# Altium PCB 导电压片.PcbDoc
Units mm, origin at the board's own origin, x right, y up, seen from the top; angles counter-clockwise.
Board outline 166.25 x 80.78 mm, 2 copper layers (Top Layer, Bottom Layer); 3 components, 19 nets, 93 pads, 24 vias.
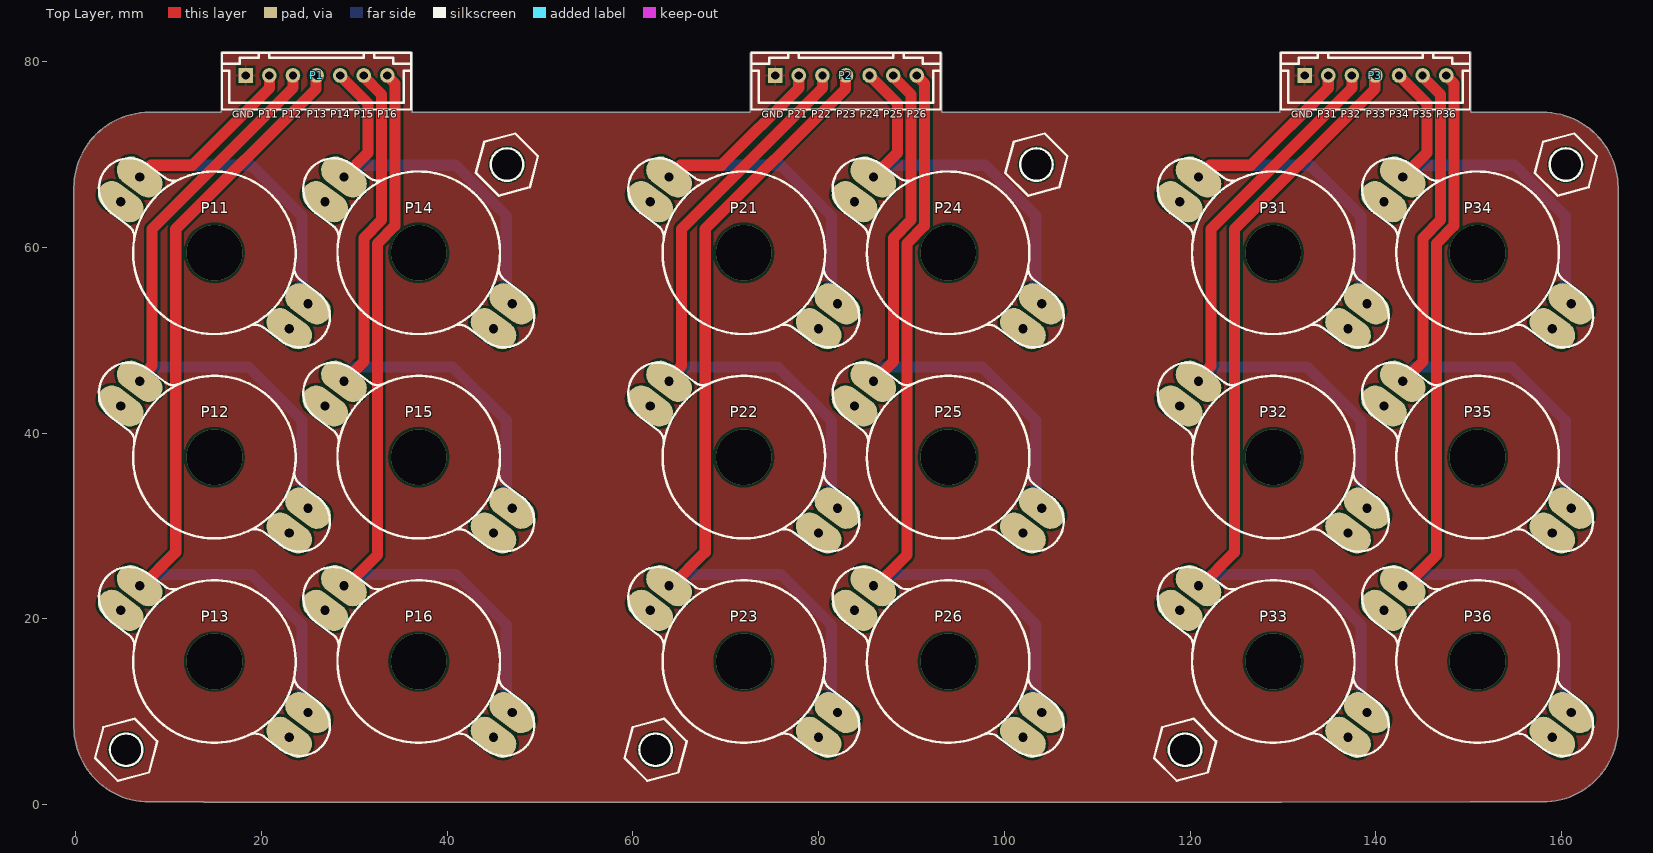
[diagram p0: Top Layer view]
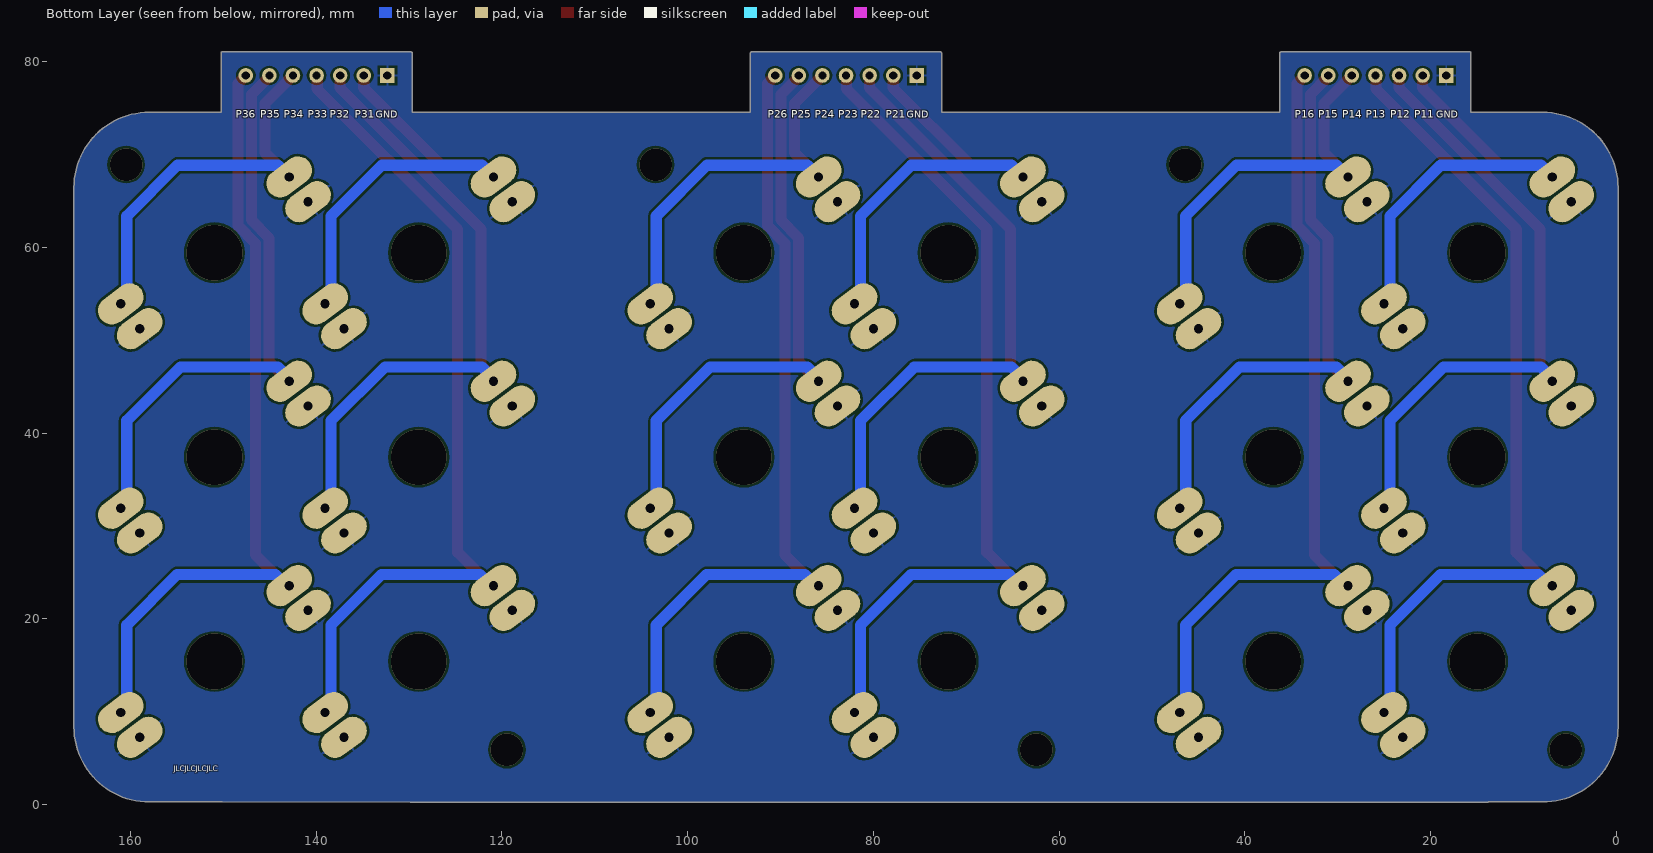
[diagram p1: Bottom Layer view, seen from below]

## Layer stack, top to bottom
Top Solder: solder mask 0.0102, Solder Resist, Dk 3.5
Top Layer: signal copper 0.0356
Dielectric 1: dielectric 0.32, FR-4, Dk 4.8
Bottom Layer: signal copper 0.0356
Bottom Solder: solder mask 0.0102, Solder Resist, Dk 3.5

## Board outline
157.955,74.534 150.241,74.534 150.241,80.909 ccw(c150.113,80.909) 150.113,81.037 129.795,81.037 ccw(c129.795,80.909) 129.668,80.909 129.668,74.558 93.24,74.558 93.24,80.909 ccw(c93.112,80.909) 93.112,81.037 72.794,81.037 ccw(c72.794,80.909) 72.667,80.909 72.667,74.558 36.241,74.558 36.241,80.909 ccw(c36.113,80.909) 36.113,81.037 15.795,81.037 ccw(c15.795,80.909) 15.668,80.909 15.668,74.549 8.001,74.558 ccw(c8.001,74.43) 7.927,74.534 ccw(c7.955,66.407) -0.173,66.407 -0.173,8.407 ccw(c7.955,8.407) 7.955,0.279 13.793,0.279 ccw(c13.867,0.383) 13.867,0.256 50.546,0.256 ccw(c50.546,0.383) 50.547,0.256 68.604,0.256 105.283,0.256 ccw(c105.283,0.383) 105.284,0.256 129.794,0.256 ccw(c129.794,0.383) 129.853,0.27 150.114,0.28 ccw(c150.114,0.407) 150.125,0.28 ccw(c150.14,0.407) 150.14,0.279 157.955,0.279 ccw(c157.955,8.407) 166.082,8.407 166.082,66.407 ccw(c157.955,66.407)

## Design rules (kind name [scope] priority, off if disabled: settings)
Clearance [All] p1: gap=0.254 ignorepadtopadclearanceinfootprint=FALSE except(0: Arc-Hole Track-Hole SMDPad-Hole THPad-Hole Via-Hole Fill-Hole Poly-Hole Region-Hole Text-Hole)
PolygonConnect [All] p1: connectstyle=Relief reliefconductorwidth=0.254 reliefentries=4 polygonreliefangle="90 Angle" airgapwidth=0.254
RoutingVias [All] p1: holewidth=0.711 width=1.27 viastyle="Through Hole" minholewidth=0.711 minwidth=1.27 maxholewidth=0.711 maxwidth=1.27
SolderMaskExpansion [All] p1: expansion=0.102
Width [All] p1: maxlimit=3 minlimit=0.254 preferedwidth=0.254 minimp=50.000000 maximp=50.000000 favimp=50.000000
30 further rules are at their usual default settings.

## Components (designator, comment, footprint, x,y, rotation, side; value= is the part's Value field where it differs from the comment)
P1 "Header-1X7P-2.54" HDR-7X1/2.54 25.954,78.496 r0 top locked
P2 "Header-1X7P-2.54" HDR-7X1/2.54 82.953,78.496 r0 top locked
P3 "Header-1X7P-2.54" HDR-7X1/2.54 139.954,78.496 r0 top locked

## Footprints (in the part's own frame and the unit in brackets; to place one, negate y for a bottom-side part, rotate by r counter-clockwise, add the part's x,y. Pads: shape width x height; smd on the part's side, far side on the other; paste and mask are expansions set on the pad)
HDR-7X1/2.54 [mil]
  rect 62x62 hole 35: 1(-300,0)
  round 62 hole 35: 2(-200,0) 3(-100,0) 4(0,0) 5(100,0) 6(200,0) 7(300,0)
  silkscreen extent -400,-145 400,95

## Free pads (board coordinates)
  oval 3x5.4 hole 1 rot 53: 2(4.873,20.907) 2(4.873,42.907) 2(4.873,64.907) 2(25.036,9.906) 2(25.036,31.906) 2(25.036,53.906) 2(26.873,20.907) 2(26.873,42.907) 2(26.873,64.907) 2(47.036,9.906) 2(47.036,31.906) 2(47.036,53.906) 2(61.873,20.907) 2(61.873,42.907) 2(61.873,64.907) 2(82.036,9.906) 2(82.036,31.906) 2(82.036,53.906) 2(83.873,20.907) 2(83.873,42.907) 2(83.873,64.907) 2(104.036,9.906) 2(104.036,31.906) 2(104.036,53.906) 2(118.873,20.907) 2(118.873,42.907) 2(118.873,64.907) 2(139.036,9.906) 2(139.036,31.906) 2(139.036,53.906) 2(140.873,20.907) 2(140.873,42.907) 2(140.873,64.907) 2(161.036,9.906) 2(161.036,31.906) 2(161.036,53.906) 3(6.905,23.574) 3(6.905,45.574) 3(6.905,67.574) 3(23.004,7.239) 3(23.004,29.239) 3(23.004,51.239) 3(28.905,23.574) 3(28.905,45.574) 3(28.905,67.574) 3(45.004,7.239) 3(45.004,29.239) 3(45.004,51.239) 3(63.905,23.574) 3(63.905,45.574) 3(63.905,67.574) 3(80.004,7.239) 3(80.004,29.239) 3(80.004,51.239) 3(85.905,23.574) 3(85.905,45.574) 3(85.905,67.574) 3(102.004,7.239) 3(102.004,29.239) 3(102.004,51.239) 3(120.905,23.574) 3(120.905,45.574) 3(120.905,67.574) 3(137.004,7.239) 3(137.004,29.239) 3(137.004,51.239) 3(142.905,23.574) 3(142.905,45.574) 3(142.905,67.574) 3(159.004,7.239) 3(159.004,29.239) 3(159.004,51.239)

## Via types
v1: diameter 6, hole 6, Top Layer to Bottom Layer, 18 vias
v2: diameter 3.5, hole 3.5, Top Layer to Bottom Layer, 6 vias

## Nets (pads, with @x,y where several pads share a name; then routed paths per layer and width w, separated by ;. In a path a pad name is that pad's centre, name@x,y a point inside that pad or via, vN(x,y) a via of type N, cw(c..) or ccw(c..) an arc to the next point about the centre after c; other vN are vias at no path point)
GND: P1.1 P2.1 P3.1 pad.2@4.873,20.907 pad.2@4.873,42.907 pad.2@4.873,64.907 pad.2@26.873,20.907 pad.2@26.873,42.907 pad.2@26.873,64.907 pad.2@61.873,20.907 pad.2@61.873,42.907 pad.2@61.873,64.907 pad.2@83.873,20.907 pad.2@83.873,42.907 pad.2@83.873,64.907 pad.2@118.873,20.907 pad.2@118.873,42.907 pad.2@118.873,64.907 pad.2@140.873,20.907 pad.2@140.873,42.907 pad.2@140.873,64.907 pad.3@23.004,7.239 pad.3@23.004,29.239 pad.3@23.004,51.239 pad.3@45.004,7.239 pad.3@45.004,29.239 pad.3@45.004,51.239 pad.3@80.004,7.239 pad.3@80.004,29.239 pad.3@80.004,51.239 pad.3@102.004,7.239 pad.3@102.004,29.239 pad.3@102.004,51.239 pad.3@137.004,7.239 pad.3@137.004,29.239 pad.3@137.004,51.239 pad.3@159.004,7.239 pad.3@159.004,29.239 pad.3@159.004,51.239
P11: P1.2 pad.2@25.036,53.906 pad.3@6.905,67.574 | length 49.5
  Top Layer w1.2: pad.3@6.778,67.447 6.778,67.484 8.128,68.834 12.573,68.834 20.874,77.135 P1.2
  Bottom Layer w1.2: pad.3@6.905,67.574 6.905,67.611 8.128,68.834 18.923,68.834 24.384,63.373 24.384,54.558 pad.2@25.036,53.906
P12: P1.3 pad.2@25.036,31.906 pad.3@6.905,45.574 | length 70.5
  Top Layer w1.2: pad.3@6.362,45.863 6.874,45.863 8.255,47.244 8.255,61.976 23.414,77.135 P1.3
  Bottom Layer w1.2: pad.3@6.905,45.537 6.905,45.574 6.905,45.894 8.128,47.117 18.603,47.117 24.384,41.336 24.384,32.521 pad.2@25.036,31.869
P13: P1.4 pad.2@25.036,9.906 pad.3@6.905,23.574 | length 92.9
  Top Layer w1.2: pad.3@7.074,23.447 10.795,27.169 10.795,61.976 25.883,77.064 25.883,78.425 P1.4
  Bottom Layer w1.2: pad.3@6.905,23.537 6.905,23.574 7.191,23.574 8.382,24.765 18.955,24.765 24.384,19.336 24.384,10.521 pad.2@25.036,9.869
P14: P1.5 pad.2@47.036,53.906 pad.3@28.905,67.574 | length 43.5
  Top Layer w1.2: P1.5 31.509,75.482 31.509,70.178 28.905,67.574 pad.3@28.778,67.447
  Bottom Layer w1.2: pad.3@28.905,67.574 28.905,67.611 30.128,68.834 40.923,68.834 46.384,63.373 46.384,54.558 pad.2@47.036,53.906
P15: P1.6 pad.2@47.036,31.906 pad.3@28.905,45.574 | length 66.1
  Top Layer w1.2: pad.3@28.778,45.447 28.905,45.574 31.058,47.727 31.058,61.017 32.963,62.922 32.963,76.466 31.034,78.395 P1.6
  Bottom Layer w1.2: pad.3@28.905,45.537 28.905,45.574 28.905,45.894 30.128,47.117 40.603,47.117 46.384,41.336 46.384,32.521 pad.2@47.036,31.869
P16: P1.7 pad.2@47.036,9.906 pad.3@28.905,23.574 | length 87.9
  Top Layer w1.2: pad.3@28.778,23.447 29.074,23.447 32.512,26.886 32.512,60.414 34.417,62.319 34.417,77.607 P1.7@33.528,78.496
  Bottom Layer w1.2: pad.3@28.905,23.537 28.905,23.574 29.191,23.574 30.382,24.765 40.955,24.765 46.384,19.336 46.384,10.521 pad.2@47.036,9.869
P21: P2.2 pad.2@82.036,53.906 pad.3@63.905,67.574 | length 49.5
  Top Layer w1.2: pad.3@63.778,67.447 63.778,67.484 65.128,68.834 69.573,68.834 77.874,77.135 P2.2
  Bottom Layer w1.2: pad.3@63.905,67.574 63.905,67.611 65.128,68.834 75.923,68.834 81.384,63.373 81.384,54.558 pad.2@82.036,53.906
P22: P2.3 pad.2@82.036,31.906 pad.3@63.905,45.574 | length 70.5
  Top Layer w1.2: pad.3@63.362,45.863 63.874,45.863 65.255,47.244 65.255,61.976 80.414,77.135 P2.3
  Bottom Layer w1.2: pad.3@63.905,45.537 63.905,45.574 63.905,45.894 65.128,47.117 75.603,47.117 81.384,41.336 81.384,32.521 pad.2@82.036,31.869
P23: P2.4 pad.2@82.036,9.906 pad.3@63.905,23.574 | length 92.9
  Top Layer w1.2: pad.3@64.074,23.447 67.795,27.169 67.795,61.976 82.883,77.064 82.883,78.425 P2.4
  Bottom Layer w1.2: pad.3@63.905,23.537 63.905,23.574 64.191,23.574 65.382,24.765 75.955,24.765 81.384,19.336 81.384,10.521 pad.2@82.036,9.869
P24: P2.5 pad.2@104.036,53.906 pad.3@85.905,67.574 | length 43.5
  Top Layer w1.2: P2.5 88.509,75.482 88.509,70.178 pad.3@85.778,67.447
  Bottom Layer w1.2: pad.3@85.905,67.574 85.905,67.611 87.128,68.834 97.923,68.834 103.384,63.373 103.384,54.558 pad.2@104.036,53.906
P25: P2.6 pad.2@104.036,31.906 pad.3@85.905,45.574 | length 66.1
  Top Layer w1.2: pad.3@85.778,45.447 88.058,47.727 88.058,61.017 89.963,62.922 89.963,76.466 88.034,78.395 P2.6
  Bottom Layer w1.2: pad.3@85.905,45.537 85.905,45.574 85.905,45.894 87.128,47.117 97.603,47.117 103.384,41.336 103.384,32.521 pad.2@104.036,31.869
P26: P2.7 pad.2@104.036,9.906 pad.3@85.905,23.574 | length 87.9
  Top Layer w1.2: pad.3@85.778,23.447 86.074,23.447 89.512,26.886 89.512,60.414 91.417,62.319 91.417,77.607 P2.7@90.528,78.496
  Bottom Layer w1.2: pad.3@85.905,23.537 85.905,23.574 86.191,23.574 87.382,24.765 97.955,24.765 103.384,19.336 103.384,10.521 pad.2@104.036,9.869
P31: P3.2 pad.2@139.036,53.906 pad.3@120.905,67.574 | length 49.5
  Top Layer w1.2: pad.3@120.778,67.447 120.778,67.484 122.128,68.834 126.573,68.834 134.874,77.135 P3.2
  Bottom Layer w1.2: pad.3@120.905,67.574 120.905,67.611 122.128,68.834 132.923,68.834 138.384,63.373 138.384,54.558 pad.2@139.036,53.906
P32: P3.3 pad.2@139.036,31.906 pad.3@120.905,45.574 | length 70.5
  Top Layer w1.2: pad.3@120.362,45.863 120.874,45.863 122.255,47.244 122.255,61.976 137.414,77.135 P3.3
  Bottom Layer w1.2: pad.3@120.905,45.537 120.905,45.574 120.905,45.894 122.128,47.117 132.603,47.117 138.384,41.336 138.384,32.521 pad.2@139.036,31.869
P33: P3.4 pad.2@139.036,9.906 pad.3@120.905,23.574 | length 92.9
  Top Layer w1.2: pad.3@121.074,23.447 124.795,27.169 124.795,61.976 139.883,77.064 139.883,78.425 P3.4
  Bottom Layer w1.2: pad.3@120.905,23.537 120.905,23.574 121.191,23.574 122.382,24.765 132.955,24.765 138.384,19.336 138.384,10.521 pad.2@139.036,9.869
P34: P3.5 pad.2@161.036,53.906 pad.3@142.905,67.574 | length 43.5
  Top Layer w1.2: P3.5 145.509,75.482 145.509,70.178 pad.3@142.778,67.447
  Bottom Layer w1.2: pad.3@142.905,67.574 142.905,67.611 144.128,68.834 154.923,68.834 160.384,63.373 160.384,54.558 pad.2@161.036,53.906
P35: P3.6 pad.2@161.036,31.906 pad.3@142.905,45.574 | length 66.1
  Top Layer w1.2: pad.3@142.778,45.447 145.058,47.727 145.058,61.017 146.963,62.922 146.963,76.466 145.034,78.395 P3.6
  Bottom Layer w1.2: pad.3@142.905,45.537 142.905,45.574 142.905,45.894 144.128,47.117 154.603,47.117 160.384,41.336 160.384,32.521 pad.2@161.036,31.869
P36: P3.7 pad.2@161.036,9.906 pad.3@142.905,23.574 | length 87.9
  Top Layer w1.2: pad.3@142.778,23.447 143.074,23.447 146.512,26.886 146.512,60.414 148.417,62.319 148.417,77.607 P3.7@147.528,78.496
  Bottom Layer w1.2: pad.3@142.905,23.537 142.905,23.574 143.191,23.574 144.382,24.765 154.955,24.765 160.384,19.336 160.384,10.521 pad.2@161.036,9.869
copper on no net:
  other v1: 14.955,15.407 36.955,15.407 71.955,15.407 93.955,15.407 128.955,15.407 150.955,15.407 14.955,37.407 36.955,37.407 71.955,37.407 93.955,37.407 128.955,37.407 150.955,37.407 14.955,59.407 36.955,59.407 71.955,59.407 93.955,59.407 128.955,59.407 150.955,59.407
  other v2: 5.455,5.907 62.455,5.907 119.455,5.907 46.455,68.907 103.455,68.907 160.455,68.907

## Polygon pours and split planes (outlines as drawn)
GND on Bottom Layer "Top Layer-No Net1" (solid, pour order 2): 157.955,74.534 150.241,74.534 150.241,80.909 ccw(c150.113,80.909) 150.113,81.037 129.795,81.037 ccw(c129.795,80.909) 129.668,80.909 129.668,74.558 93.24,74.558 93.24,80.909 ccw(c93.112,80.909) 93.112,81.037 72.794,81.037 ccw(c72.794,80.909) 72.667,80.909 72.667,74.558 36.241,74.558 36.241,80.909 ccw(c36.113,80.909) 36.113,81.037 15.795,81.037 ccw(c15.795,80.909) 15.668,80.909 15.668,74.549 8.001,74.558 ccw(c8.001,74.43) 7.927,74.534 ccw(c7.955,66.407) -0.173,66.407 -0.173,8.407 ccw(c7.955,8.407) 7.955,0.279 13.793,0.279 ccw(c13.867,0.383) 13.867,0.256 50.546,0.256 ccw(c50.546,0.383) 50.547,0.256 68.604,0.256 105.283,0.256 ccw(c105.283,0.383) 105.284,0.256 129.794,0.256 ccw(c129.794,0.383) 129.853,0.27 150.114,0.28 ccw(c150.114,0.407) 150.125,0.28 ccw(c150.14,0.407) 150.14,0.279 157.955,0.279 ccw(c157.955,8.407) 166.082,8.407 166.082,66.407 ccw(c157.955,66.407)
GND on Top Layer "Top Layer-No Net" (solid, pour order 1): 157.955,74.534 150.241,74.534 150.241,80.909 ccw(c150.113,80.909) 150.113,81.037 129.795,81.037 ccw(c129.795,80.909) 129.668,80.909 129.668,74.558 93.24,74.558 93.24,80.909 ccw(c93.112,80.909) 93.112,81.037 72.794,81.037 ccw(c72.794,80.909) 72.667,80.909 72.667,74.558 36.241,74.558 36.241,80.909 ccw(c36.113,80.909) 36.113,81.037 15.795,81.037 ccw(c15.795,80.909) 15.668,80.909 15.668,74.549 8.001,74.558 ccw(c8.001,74.43) 7.927,74.534 ccw(c7.955,66.407) -0.173,66.407 -0.173,8.407 ccw(c7.955,8.407) 7.955,0.279 13.793,0.279 ccw(c13.867,0.383) 13.867,0.256 50.546,0.256 ccw(c50.546,0.383) 50.547,0.256 68.604,0.256 105.283,0.256 ccw(c105.283,0.383) 105.284,0.256 129.794,0.256 ccw(c129.794,0.383) 129.853,0.27 150.114,0.28 ccw(c150.114,0.407) 150.125,0.28 ccw(c150.14,0.407) 150.14,0.279 157.955,0.279 ccw(c157.955,8.407) 166.082,8.407 166.082,66.407 ccw(c157.955,66.407)

## Silkscreen, mask and mechanical layers (free items; w line width, h text height)
Top Overlay:
  drawing of 315 lines, arcs and shapes, not listed
  text "GND" at 16.891,73.66 h1.3
  text "P11" at 19.685,73.66 h1.4
  text "P12" at 22.225,73.66 h1.4
  text "P13" at 24.892,73.66 h1.4
  text "P14" at 27.432,73.66 h1.4
  text "P15" at 29.972,73.66 h1.4
  text "P16" at 32.512,73.66 h1.4
  text "GND" at 73.89,73.66 h1.3
  text "P21" at 76.684,73.66 h1.4
  text "P22" at 79.224,73.66 h1.4
  text "P23" at 81.891,73.66 h1.4
  text "P24" at 84.431,73.66 h1.4
  text "P25" at 86.971,73.66 h1.4
  text "P26" at 89.511,73.66 h1.4
  text "GND" at 130.891,73.66 h1.3
  text "P31" at 133.685,73.66 h1.4
  text "P32" at 136.225,73.66 h1.4
  text "P33" at 138.892,73.66 h1.4
  text "P34" at 141.432,73.66 h1.4
  text "P35" at 143.972,73.66 h1.4
  text "P36" at 146.512,73.66 h1.4
  text "P11" at 13.462,63.246 h2
  text "P14" at 35.462,63.246 h2
  text "P21" at 70.462,63.246 h2
  text "P24" at 92.462,63.246 h2
  text "P31" at 127.462,63.246 h2
  text "P34" at 149.462,63.246 h2
  text "P12" at 13.462,41.246 h2
  text "P15" at 35.462,41.246 h2
  text "P22" at 70.462,41.246 h2
  text "P25" at 92.462,41.246 h2
  text "P32" at 127.462,41.246 h2
  text "P35" at 149.462,41.246 h2
  text "P13" at 13.462,19.246 h2
  text "P16" at 35.462,19.246 h2
  text "P23" at 70.462,19.246 h2
  text "P26" at 92.462,19.246 h2
  text "P33" at 127.462,19.246 h2
  text "P36" at 149.462,19.246 h2
Bottom Overlay:
  text "GND" at 19.385,73.65 h1.3
  text "P11" at 21.798,73.65 h1.4
  text "P12" at 24.338,73.65 h1.4
  text "P13" at 27.005,73.65 h1.4
  text "P14" at 29.545,73.65 h1.4
  text "P15" at 32.085,73.65 h1.4
  text "P16" at 34.625,73.65 h1.4
  text "GND" at 76.408,73.65 h1.3
  text "P21" at 78.694,73.65 h1.4
  text "P22" at 81.361,73.65 h1.4
  text "P23" at 83.774,73.65 h1.4
  text "P24" at 86.314,73.65 h1.4
  text "P25" at 88.854,73.65 h1.4
  text "P26" at 91.394,73.65 h1.4
  text "GND" at 133.558,73.66 h1.3
  text "P31" at 135.844,73.66 h1.4
  text "P32" at 138.511,73.66 h1.4
  text "P33" at 140.924,73.66 h1.4
  text "P34" at 143.464,73.66 h1.4
  text "P35" at 146.004,73.66 h1.4
  text "P36" at 148.671,73.66 h1.4
  text "JLCJLCJLCJLC" at 155.321,3.397 h1
Mechanical 1:
  lines w0.254: 7.955,74.407 ccw(c7.955,66.407) -0.045,66.407 -0.045,8.407 ccw(c7.955,8.407) 7.955,0.407 15.748,0.407 ; 8.001,74.43 15.748,74.422 ; 13.867,0.383 50.546,0.383 ; 15.795,74.43 15.795,80.909 36.113,80.909 36.113,74.432 ; 36.115,74.43 72.794,74.43 72.794,80.909 93.112,80.909 93.112,74.432 ; 36.116,0.383 72.795,0.383 ; 68.604,0.383 105.283,0.383 ; 93.114,74.43 129.793,74.43 ; 93.115,0.383 129.794,0.383 ; 113.18,0.389 150.114,0.407 ; 129.795,74.43 129.795,80.909 150.113,80.909 150.113,74.432 ; 150.114,74.407 157.955,74.407 cw(c157.955,66.407) 165.955,66.407 165.955,8.407 cw(c157.955,8.407) 157.955,0.407 150.14,0.407